# EAGLE board SparkFun_Lipo_Fuel_Gauge_Panel_v11 (EAGLE 7.4.0), part 1 of 5
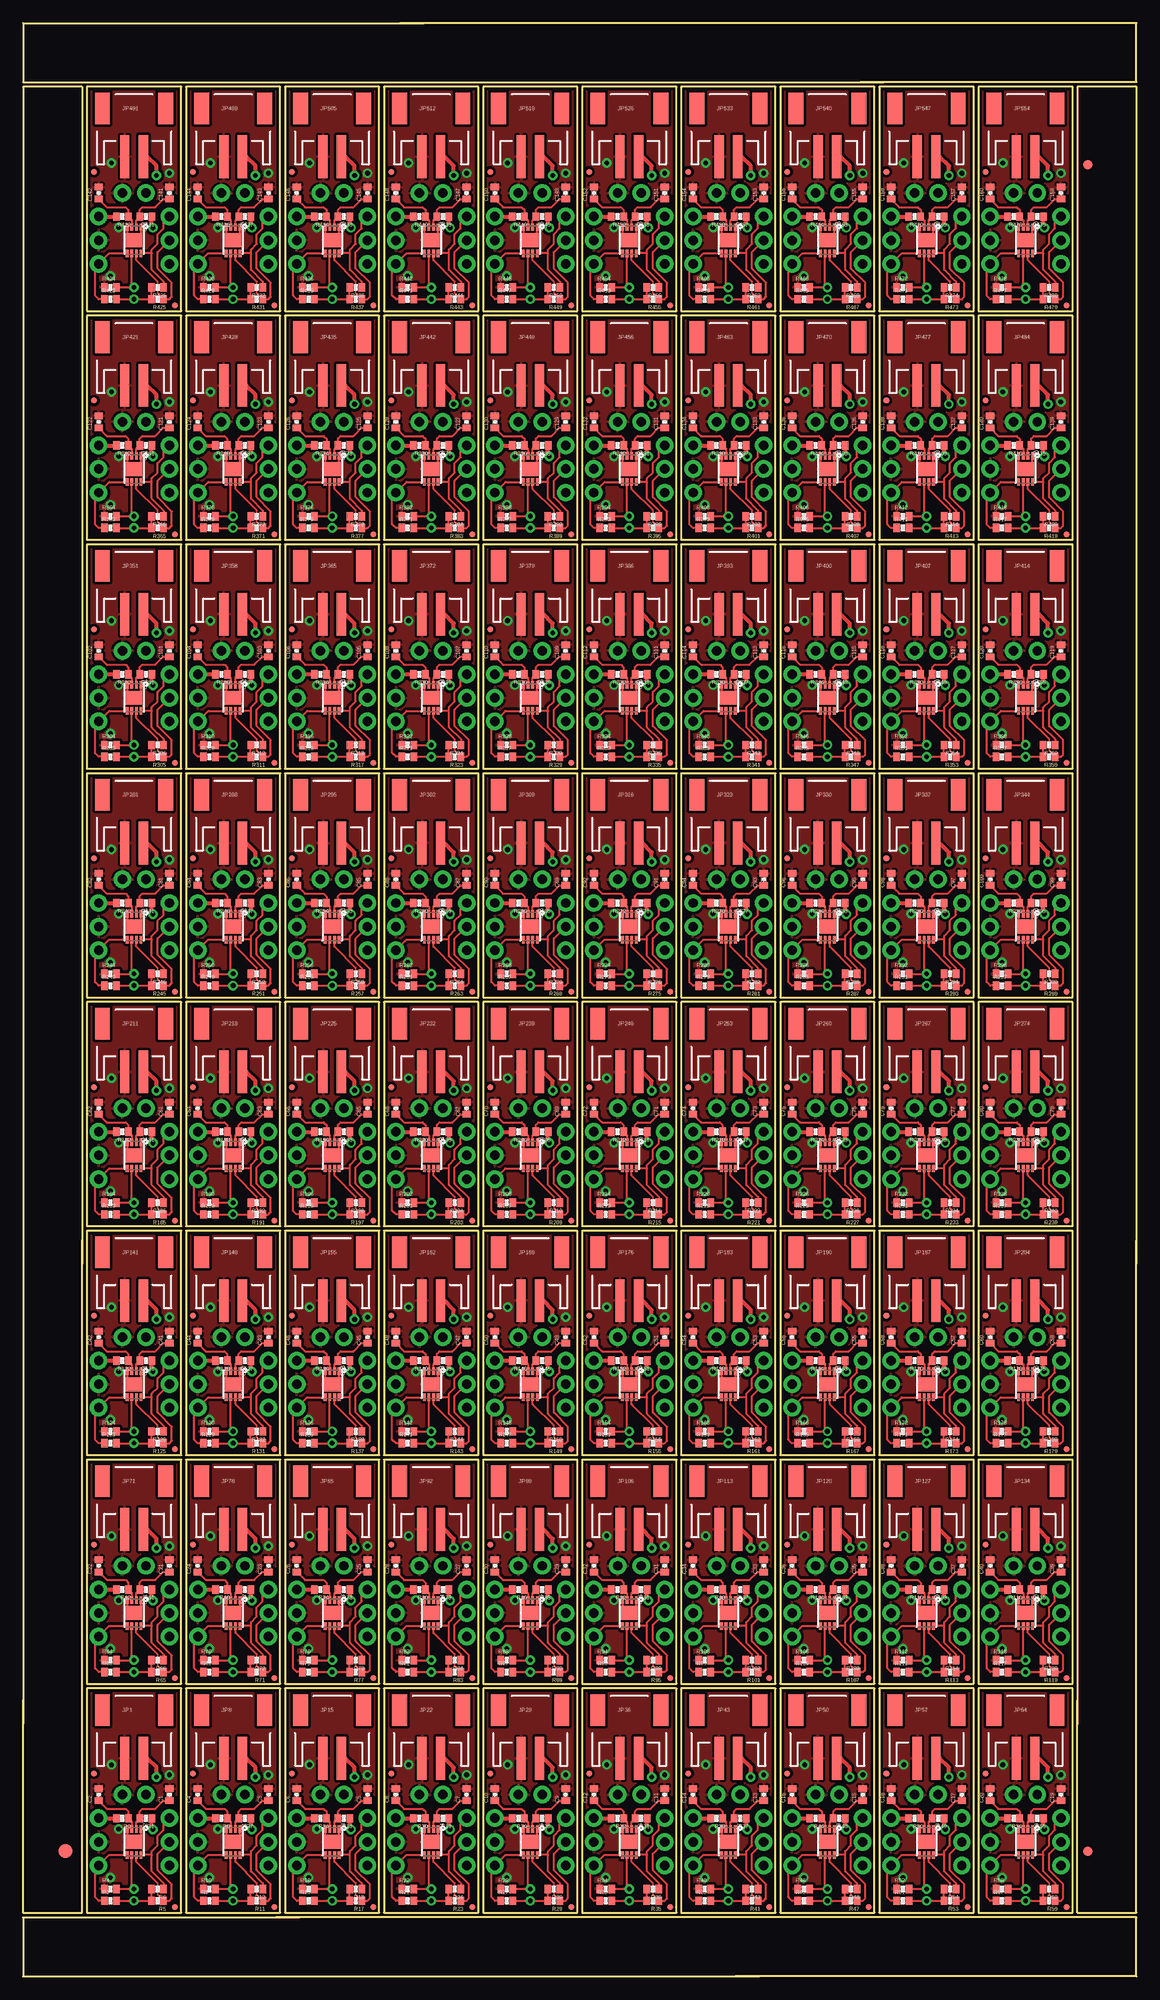
[diagram p0: board, top side]
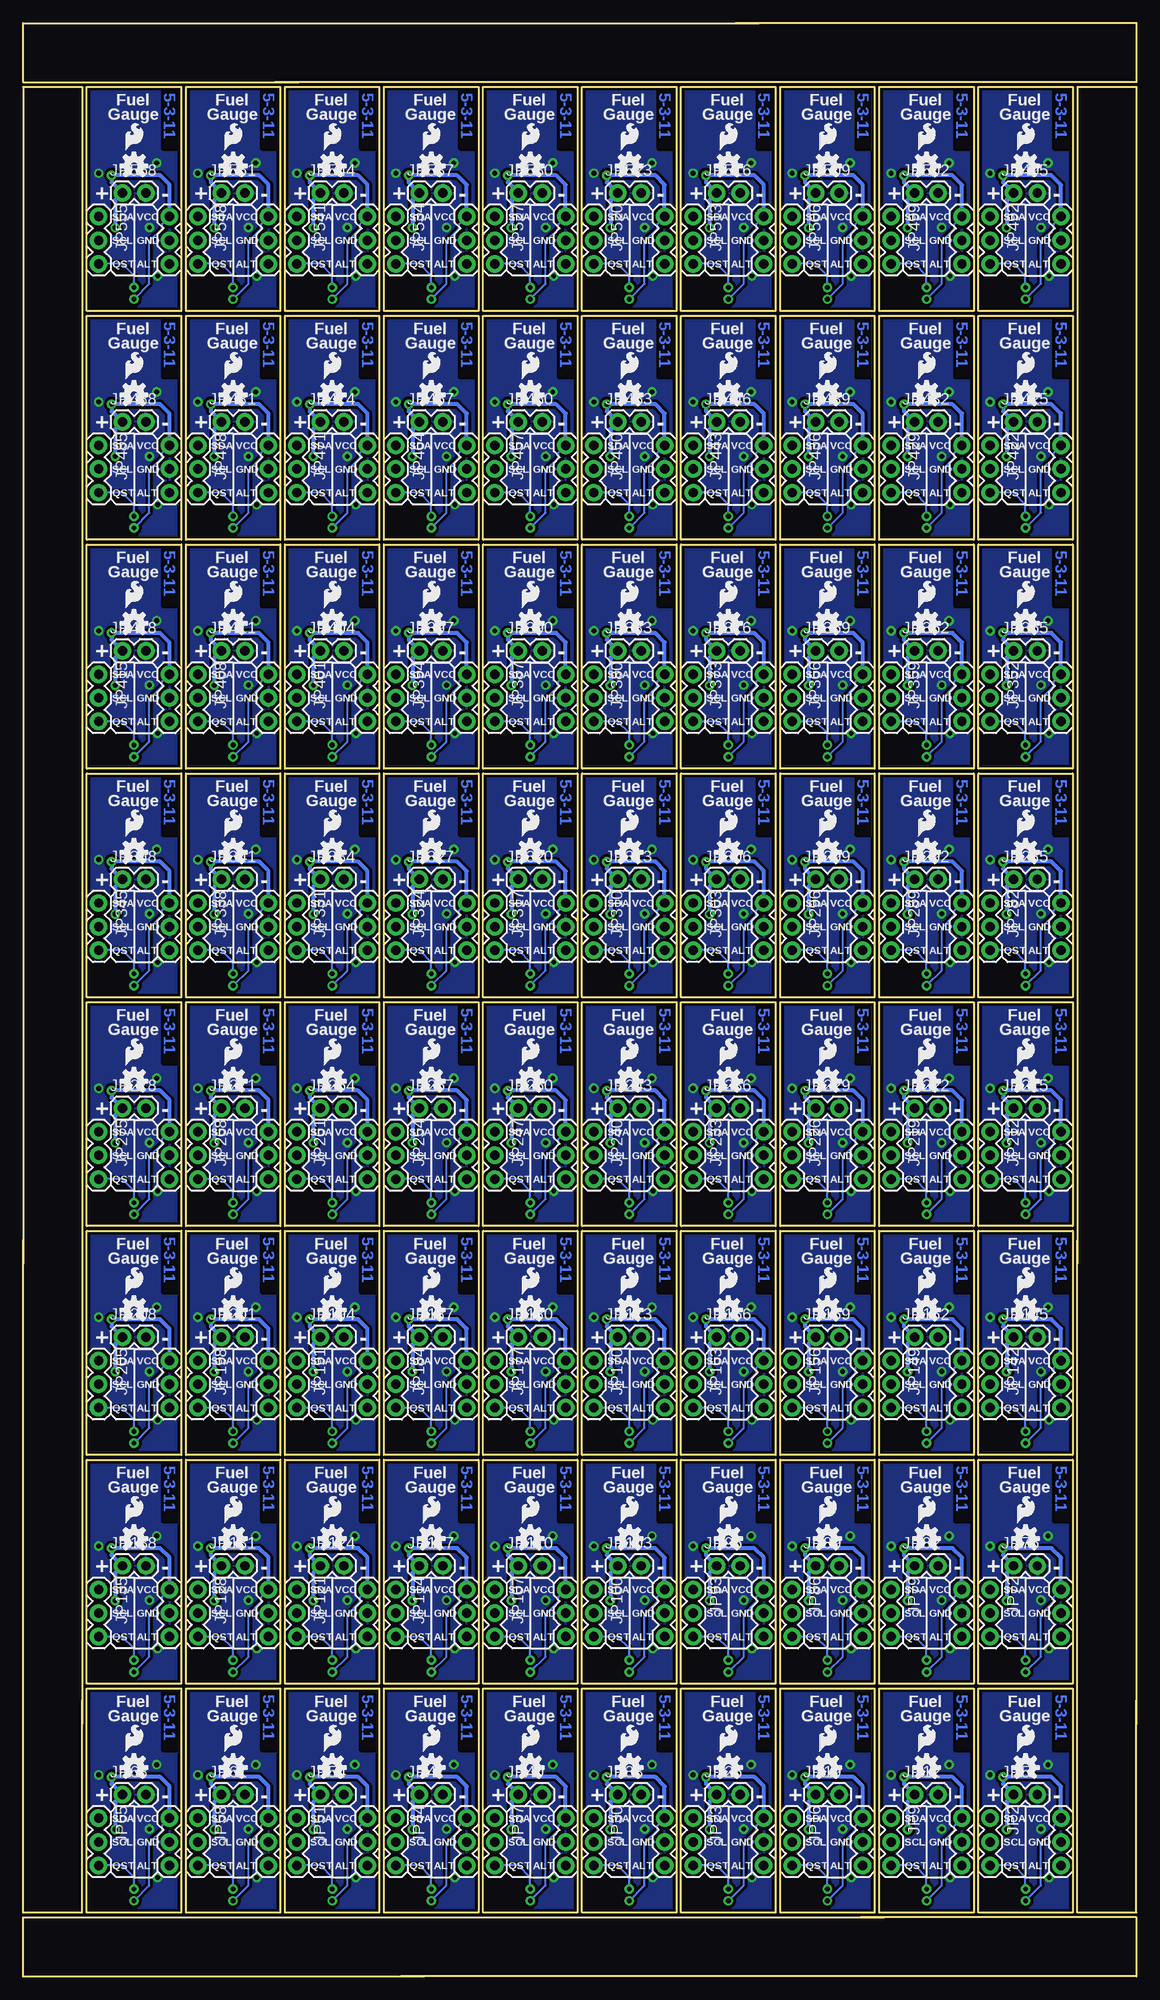
[diagram p1: board, bottom side, seen from below]

Size 119.89 x 210.31 mm. Coordinates in mm from the lower left corner, seen from the top.
Outline: 344 segments
Copper layers (1*16): Top 0.035mm / dielectric 1.5mm / Bottom 0.035mm
Design rules "SparkFun": minimum track width 8mil, minimum drill 20mil, track to track 8mil, track to pad 8mil, pad to pad 8mil, via to via 8mil, smd to smd 8mil, copper to edge 8mil, drill to drill 8mil, minimum pad ring 12mil, minimum via ring 10mil, stop-mask expansion 4mil, vias tented up to drill 20mil, thermal gap 10mil

## Footprints (pad centres in the part's own frame; a part is rotated, then mirrored left to right if it is on the bottom)
0402-CAP = smd 0.7 x 0.9: 1 -0.65,0; 2 0.65,0
FIDUCIAL-1.5X3 = smd 1.5 x 1.5: 1 0,0
FIDUCIAL-1X2 = smd 1 x 1: 1 0,0
JST-2-SMD = smd 1 x 4.6: 1 -1,-3.7; 2 1,-3.7 | smd 1.6 x 3.4: NC1 -3.4,1.5; NC2 3.4,1.5
1X03 = drill 1.016 pad 1.88: 1 0,0; 2 2.54,0; 3 5.08,0
1X02 = drill 1.016 pad 1.88: 1 0,0; 2 2.54,0
FIDUCIAL-1X2.5 = smd 0.635 x 0.635: 1 0,0
0402-RES = smd 0.7 x 0.9: 1 -0.65,0; 2 0.65,0
TDFN-8 = smd 0.8 x 0.3: 1 -1.4,0.75; 2 -1.4,0.25; 3 -1.4,-0.25; 4 -1.4,-0.75; 5 1.4,-0.75; 6 1.4,-0.25; 7 1.4,0.25; 8 1.4,0.75 | smd 1.5 x 1.88: EP 0,0

## Placement (x,y rotation side)
C1  1uF  [0402-CAP]  15.75,19.56 90 top
C2  10nF  [0402-CAP]  8.13,19.56 90 top
C3  1uF  [0402-CAP]  26.42,19.56 90 top
C4  10nF  [0402-CAP]  18.8,19.56 90 top
C5  1uF  [0402-CAP]  37.08,19.56 90 top
C6  10nF  [0402-CAP]  29.46,19.56 90 top
C7  1uF  [0402-CAP]  47.75,19.56 90 top
C8  10nF  [0402-CAP]  40.13,19.56 90 top
C9  1uF  [0402-CAP]  58.42,19.56 90 top
C10  10nF  [0402-CAP]  50.8,19.56 90 top
C11  1uF  [0402-CAP]  69.09,19.56 90 top
C12  10nF  [0402-CAP]  61.47,19.56 90 top
C13  1uF  [0402-CAP]  79.76,19.56 90 top
C14  10nF  [0402-CAP]  72.14,19.56 90 top
C15  1uF  [0402-CAP]  90.42,19.56 90 top
C16  10nF  [0402-CAP]  82.8,19.56 90 top
C17  1uF  [0402-CAP]  101.09,19.56 90 top
C18  10nF  [0402-CAP]  93.47,19.56 90 top
C19  1uF  [0402-CAP]  111.76,19.56 90 top
C20  10nF  [0402-CAP]  104.14,19.56 90 top
C21  1uF  [0402-CAP]  15.75,44.2 90 top
C22  10nF  [0402-CAP]  8.13,44.2 90 top
C23  1uF  [0402-CAP]  26.42,44.2 90 top
C24  10nF  [0402-CAP]  18.8,44.2 90 top
C25  1uF  [0402-CAP]  37.08,44.2 90 top
C26  10nF  [0402-CAP]  29.46,44.2 90 top
C27  1uF  [0402-CAP]  47.75,44.2 90 top
C28  10nF  [0402-CAP]  40.13,44.2 90 top
C29  1uF  [0402-CAP]  58.42,44.2 90 top
C30  10nF  [0402-CAP]  50.8,44.2 90 top
C31  1uF  [0402-CAP]  69.09,44.2 90 top
C32  10nF  [0402-CAP]  61.47,44.2 90 top
C33  1uF  [0402-CAP]  79.76,44.2 90 top
C34  10nF  [0402-CAP]  72.14,44.2 90 top
C35  1uF  [0402-CAP]  90.42,44.2 90 top
C36  10nF  [0402-CAP]  82.8,44.2 90 top
C37  1uF  [0402-CAP]  101.09,44.2 90 top
C38  10nF  [0402-CAP]  93.47,44.2 90 top
C39  1uF  [0402-CAP]  111.76,44.2 90 top
C40  10nF  [0402-CAP]  104.14,44.2 90 top
C41  1uF  [0402-CAP]  15.75,68.83 90 top
C42  10nF  [0402-CAP]  8.13,68.83 90 top
C43  1uF  [0402-CAP]  26.42,68.83 90 top
C44  10nF  [0402-CAP]  18.8,68.83 90 top
C45  1uF  [0402-CAP]  37.08,68.83 90 top
C46  10nF  [0402-CAP]  29.46,68.83 90 top
C47  1uF  [0402-CAP]  47.75,68.83 90 top
C48  10nF  [0402-CAP]  40.13,68.83 90 top
C49  1uF  [0402-CAP]  58.42,68.83 90 top
C50  10nF  [0402-CAP]  50.8,68.83 90 top
C51  1uF  [0402-CAP]  69.09,68.83 90 top
C52  10nF  [0402-CAP]  61.47,68.83 90 top
C53  1uF  [0402-CAP]  79.76,68.83 90 top
C54  10nF  [0402-CAP]  72.14,68.83 90 top
C55  1uF  [0402-CAP]  90.42,68.83 90 top
C56  10nF  [0402-CAP]  82.8,68.83 90 top
C57  1uF  [0402-CAP]  101.09,68.83 90 top
C58  10nF  [0402-CAP]  93.47,68.83 90 top
C59  1uF  [0402-CAP]  111.76,68.83 90 top
C60  10nF  [0402-CAP]  104.14,68.83 90 top
C61  1uF  [0402-CAP]  15.75,93.47 90 top
C62  10nF  [0402-CAP]  8.13,93.47 90 top
C63  1uF  [0402-CAP]  26.42,93.47 90 top
C64  10nF  [0402-CAP]  18.8,93.47 90 top
C65  1uF  [0402-CAP]  37.08,93.47 90 top
C66  10nF  [0402-CAP]  29.46,93.47 90 top
C67  1uF  [0402-CAP]  47.75,93.47 90 top
C68  10nF  [0402-CAP]  40.13,93.47 90 top
C69  1uF  [0402-CAP]  58.42,93.47 90 top
C70  10nF  [0402-CAP]  50.8,93.47 90 top
C71  1uF  [0402-CAP]  69.09,93.47 90 top
C72  10nF  [0402-CAP]  61.47,93.47 90 top
C73  1uF  [0402-CAP]  79.76,93.47 90 top
C74  10nF  [0402-CAP]  72.14,93.47 90 top
C75  1uF  [0402-CAP]  90.42,93.47 90 top
C76  10nF  [0402-CAP]  82.8,93.47 90 top
C77  1uF  [0402-CAP]  101.09,93.47 90 top
C78  10nF  [0402-CAP]  93.47,93.47 90 top
C79  1uF  [0402-CAP]  111.76,93.47 90 top
C80  10nF  [0402-CAP]  104.14,93.47 90 top
C81  1uF  [0402-CAP]  15.75,118.11 90 top
C82  10nF  [0402-CAP]  8.13,118.11 90 top
C83  1uF  [0402-CAP]  26.42,118.11 90 top
C84  10nF  [0402-CAP]  18.8,118.11 90 top
C85  1uF  [0402-CAP]  37.08,118.11 90 top
C86  10nF  [0402-CAP]  29.46,118.11 90 top
C87  1uF  [0402-CAP]  47.75,118.11 90 top
C88  10nF  [0402-CAP]  40.13,118.11 90 top
C89  1uF  [0402-CAP]  58.42,118.11 90 top
C90  10nF  [0402-CAP]  50.8,118.11 90 top
C91  1uF  [0402-CAP]  69.09,118.11 90 top
C92  10nF  [0402-CAP]  61.47,118.11 90 top
C93  1uF  [0402-CAP]  79.76,118.11 90 top
C94  10nF  [0402-CAP]  72.14,118.11 90 top
C95  1uF  [0402-CAP]  90.42,118.11 90 top
C96  10nF  [0402-CAP]  82.8,118.11 90 top
C97  1uF  [0402-CAP]  101.09,118.11 90 top
C98  10nF  [0402-CAP]  93.47,118.11 90 top
C99  1uF  [0402-CAP]  111.76,118.11 90 top
C100  10nF  [0402-CAP]  104.14,118.11 90 top
C101  1uF  [0402-CAP]  15.75,142.75 90 top
C102  10nF  [0402-CAP]  8.13,142.75 90 top
C103  1uF  [0402-CAP]  26.42,142.75 90 top
C104  10nF  [0402-CAP]  18.8,142.75 90 top
C105  1uF  [0402-CAP]  37.08,142.75 90 top
C106  10nF  [0402-CAP]  29.46,142.75 90 top
C107  1uF  [0402-CAP]  47.75,142.75 90 top
C108  10nF  [0402-CAP]  40.13,142.75 90 top
C109  1uF  [0402-CAP]  58.42,142.75 90 top
C110  10nF  [0402-CAP]  50.8,142.75 90 top
C111  1uF  [0402-CAP]  69.09,142.75 90 top
C112  10nF  [0402-CAP]  61.47,142.75 90 top
C113  1uF  [0402-CAP]  79.76,142.75 90 top
C114  10nF  [0402-CAP]  72.14,142.75 90 top
C115  1uF  [0402-CAP]  90.42,142.75 90 top
C116  10nF  [0402-CAP]  82.8,142.75 90 top
C117  1uF  [0402-CAP]  101.09,142.75 90 top
C118  10nF  [0402-CAP]  93.47,142.75 90 top
C119  1uF  [0402-CAP]  111.76,142.75 90 top
C120  10nF  [0402-CAP]  104.14,142.75 90 top
C121  1uF  [0402-CAP]  15.75,167.39 90 top
C122  10nF  [0402-CAP]  8.13,167.39 90 top
C123  1uF  [0402-CAP]  26.42,167.39 90 top
C124  10nF  [0402-CAP]  18.8,167.39 90 top
C125  1uF  [0402-CAP]  37.08,167.39 90 top
C126  10nF  [0402-CAP]  29.46,167.39 90 top
C127  1uF  [0402-CAP]  47.75,167.39 90 top
C128  10nF  [0402-CAP]  40.13,167.39 90 top
C129  1uF  [0402-CAP]  58.42,167.39 90 top
C130  10nF  [0402-CAP]  50.8,167.39 90 top
C131  1uF  [0402-CAP]  69.09,167.39 90 top
C132  10nF  [0402-CAP]  61.47,167.39 90 top
C133  1uF  [0402-CAP]  79.76,167.39 90 top
C134  10nF  [0402-CAP]  72.14,167.39 90 top
C135  1uF  [0402-CAP]  90.42,167.39 90 top
C136  10nF  [0402-CAP]  82.8,167.39 90 top
C137  1uF  [0402-CAP]  101.09,167.39 90 top
C138  10nF  [0402-CAP]  93.47,167.39 90 top
C139  1uF  [0402-CAP]  111.76,167.39 90 top
C140  10nF  [0402-CAP]  104.14,167.39 90 top
C141  1uF  [0402-CAP]  15.75,192.02 90 top
C142  10nF  [0402-CAP]  8.13,192.02 90 top
C143  1uF  [0402-CAP]  26.42,192.02 90 top
C144  10nF  [0402-CAP]  18.8,192.02 90 top
C145  1uF  [0402-CAP]  37.08,192.02 90 top
C146  10nF  [0402-CAP]  29.46,192.02 90 top
C147  1uF  [0402-CAP]  47.75,192.02 90 top
C148  10nF  [0402-CAP]  40.13,192.02 90 top
C149  1uF  [0402-CAP]  58.42,192.02 90 top
C150  10nF  [0402-CAP]  50.8,192.02 90 top
C151  1uF  [0402-CAP]  69.09,192.02 90 top
C152  10nF  [0402-CAP]  61.47,192.02 90 top
C153  1uF  [0402-CAP]  79.76,192.02 90 top
C154  10nF  [0402-CAP]  72.14,192.02 90 top
C155  1uF  [0402-CAP]  90.42,192.02 90 top
C156  10nF  [0402-CAP]  82.8,192.02 90 top
C157  1uF  [0402-CAP]  101.09,192.02 90 top
C158  10nF  [0402-CAP]  93.47,192.02 90 top
C159  1uF  [0402-CAP]  111.76,192.02 90 top
C160  10nF  [0402-CAP]  104.14,192.02 90 top
E$1  [FIDUCIAL-1.5X3]  4.57,13.46 0 top
E$2  [FIDUCIAL-1X2]  114.68,195.07 0 top
E$5  [FIDUCIAL-1X2]  114.68,13.46 0 top
JP1  input  [JST-2-SMD]  11.94,27.18 0 top
JP2  [1X03]  15.75,17.02 270 bottom
JP3  LOGO-SFESK  [SFE-LOGO-FLAME]  12.83,24.21 0 bottom
JP4  [1X03]  8.13,17.02 270 bottom
JP5  [1X02]  13.21,19.56 0 bottom
JP6  FIDUCIAL1X2.5  [FIDUCIAL-1X2.5]  16.36,7.47 0 top
JP7  FIDUCIAL1X2.5  [FIDUCIAL-1X2.5]  7.62,21.84 0 top
JP8  input  [JST-2-SMD]  22.61,27.18 0 top
JP9  [1X03]  26.42,17.02 270 bottom
JP10  [1X03]  18.8,17.02 270 bottom
JP11  LOGO-SFESK  [SFE-LOGO-FLAME]  23.5,24.21 0 bottom
JP12  [1X02]  23.88,19.56 0 bottom
JP13  FIDUCIAL1X2.5  [FIDUCIAL-1X2.5]  27.03,7.47 0 top
JP14  FIDUCIAL1X2.5  [FIDUCIAL-1X2.5]  18.29,21.84 0 top
JP15  input  [JST-2-SMD]  33.27,27.18 0 top
JP16  [1X03]  37.08,17.02 270 bottom
JP17  [1X03]  29.46,17.02 270 bottom
JP18  LOGO-SFESK  [SFE-LOGO-FLAME]  34.16,24.21 0 bottom
JP19  [1X02]  34.54,19.56 0 bottom
JP20  FIDUCIAL1X2.5  [FIDUCIAL-1X2.5]  37.69,7.47 0 top
JP21  FIDUCIAL1X2.5  [FIDUCIAL-1X2.5]  28.96,21.84 0 top
JP22  input  [JST-2-SMD]  43.94,27.18 0 top
JP23  [1X03]  47.75,17.02 270 bottom
JP24  [1X03]  40.13,17.02 270 bottom
JP25  LOGO-SFESK  [SFE-LOGO-FLAME]  44.83,24.21 0 bottom
JP26  [1X02]  45.21,19.56 0 bottom
JP27  FIDUCIAL1X2.5  [FIDUCIAL-1X2.5]  48.36,7.47 0 top
JP28  FIDUCIAL1X2.5  [FIDUCIAL-1X2.5]  39.62,21.84 0 top
JP29  input  [JST-2-SMD]  54.61,27.18 0 top
JP30  [1X03]  58.42,17.02 270 bottom
JP31  [1X03]  50.8,17.02 270 bottom
JP32  LOGO-SFESK  [SFE-LOGO-FLAME]  55.5,24.21 0 bottom
JP33  [1X02]  55.88,19.56 0 bottom
JP34  FIDUCIAL1X2.5  [FIDUCIAL-1X2.5]  59.03,7.47 0 top
JP35  FIDUCIAL1X2.5  [FIDUCIAL-1X2.5]  50.29,21.84 0 top
JP36  input  [JST-2-SMD]  65.28,27.18 0 top
JP37  [1X03]  69.09,17.02 270 bottom
JP38  [1X03]  61.47,17.02 270 bottom
JP39  LOGO-SFESK  [SFE-LOGO-FLAME]  66.17,24.21 0 bottom
JP40  [1X02]  66.55,19.56 0 bottom
JP41  FIDUCIAL1X2.5  [FIDUCIAL-1X2.5]  69.7,7.47 0 top
JP42  FIDUCIAL1X2.5  [FIDUCIAL-1X2.5]  60.96,21.84 0 top
JP43  input  [JST-2-SMD]  75.95,27.18 0 top
JP44  [1X03]  79.76,17.02 270 bottom
JP45  [1X03]  72.14,17.02 270 bottom
JP46  LOGO-SFESK  [SFE-LOGO-FLAME]  76.83,24.21 0 bottom
JP47  [1X02]  77.22,19.56 0 bottom
JP48  FIDUCIAL1X2.5  [FIDUCIAL-1X2.5]  80.37,7.47 0 top
JP49  FIDUCIAL1X2.5  [FIDUCIAL-1X2.5]  71.63,21.84 0 top
JP50  input  [JST-2-SMD]  86.61,27.18 0 top
JP51  [1X03]  90.42,17.02 270 bottom
JP52  [1X03]  82.8,17.02 270 bottom
JP53  LOGO-SFESK  [SFE-LOGO-FLAME]  87.5,24.21 0 bottom
JP54  [1X02]  87.88,19.56 0 bottom
JP55  FIDUCIAL1X2.5  [FIDUCIAL-1X2.5]  91.03,7.47 0 top
JP56  FIDUCIAL1X2.5  [FIDUCIAL-1X2.5]  82.3,21.84 0 top
JP57  input  [JST-2-SMD]  97.28,27.18 0 top
JP58  [1X03]  101.09,17.02 270 bottom
JP59  [1X03]  93.47,17.02 270 bottom
JP60  LOGO-SFESK  [SFE-LOGO-FLAME]  98.17,24.21 0 bottom
JP61  [1X02]  98.55,19.56 0 bottom
JP62  FIDUCIAL1X2.5  [FIDUCIAL-1X2.5]  101.7,7.47 0 top
JP63  FIDUCIAL1X2.5  [FIDUCIAL-1X2.5]  92.96,21.84 0 top
JP64  input  [JST-2-SMD]  107.95,27.18 0 top
JP65  [1X03]  111.76,17.02 270 bottom
JP66  [1X03]  104.14,17.02 270 bottom
JP67  LOGO-SFESK  [SFE-LOGO-FLAME]  108.84,24.21 0 bottom
JP68  [1X02]  109.22,19.56 0 bottom
JP69  FIDUCIAL1X2.5  [FIDUCIAL-1X2.5]  112.37,7.47 0 top
JP70  FIDUCIAL1X2.5  [FIDUCIAL-1X2.5]  103.63,21.84 0 top
JP71  input  [JST-2-SMD]  11.94,51.82 0 top
JP72  [1X03]  15.75,41.66 270 bottom
JP73  [1X03]  8.13,41.66 270 bottom
JP74  LOGO-SFESK  [SFE-LOGO-FLAME]  12.83,48.84 0 bottom
JP75  [1X02]  13.21,44.2 0 bottom
JP76  FIDUCIAL1X2.5  [FIDUCIAL-1X2.5]  16.36,32.11 0 top
JP77  FIDUCIAL1X2.5  [FIDUCIAL-1X2.5]  7.62,46.48 0 top
JP78  input  [JST-2-SMD]  22.61,51.82 0 top
JP79  [1X03]  26.42,41.66 270 bottom
JP80  [1X03]  18.8,41.66 270 bottom
JP81  LOGO-SFESK  [SFE-LOGO-FLAME]  23.5,48.84 0 bottom
JP82  [1X02]  23.88,44.2 0 bottom
JP83  FIDUCIAL1X2.5  [FIDUCIAL-1X2.5]  27.03,32.11 0 top
JP84  FIDUCIAL1X2.5  [FIDUCIAL-1X2.5]  18.29,46.48 0 top
JP85  input  [JST-2-SMD]  33.27,51.82 0 top
JP86  [1X03]  37.08,41.66 270 bottom
JP87  [1X03]  29.46,41.66 270 bottom
JP88  LOGO-SFESK  [SFE-LOGO-FLAME]  34.16,48.84 0 bottom
JP89  [1X02]  34.54,44.2 0 bottom
JP90  FIDUCIAL1X2.5  [FIDUCIAL-1X2.5]  37.69,32.11 0 top
JP91  FIDUCIAL1X2.5  [FIDUCIAL-1X2.5]  28.96,46.48 0 top
JP92  input  [JST-2-SMD]  43.94,51.82 0 top
JP93  [1X03]  47.75,41.66 270 bottom
JP94  [1X03]  40.13,41.66 270 bottom
JP95  LOGO-SFESK  [SFE-LOGO-FLAME]  44.83,48.84 0 bottom
JP96  [1X02]  45.21,44.2 0 bottom
JP97  FIDUCIAL1X2.5  [FIDUCIAL-1X2.5]  48.36,32.11 0 top
JP98  FIDUCIAL1X2.5  [FIDUCIAL-1X2.5]  39.62,46.48 0 top
JP99  input  [JST-2-SMD]  54.61,51.82 0 top
JP100  [1X03]  58.42,41.66 270 bottom
JP101  [1X03]  50.8,41.66 270 bottom
JP102  LOGO-SFESK  [SFE-LOGO-FLAME]  55.5,48.84 0 bottom
JP103  [1X02]  55.88,44.2 0 bottom
JP104  FIDUCIAL1X2.5  [FIDUCIAL-1X2.5]  59.03,32.11 0 top
JP105  FIDUCIAL1X2.5  [FIDUCIAL-1X2.5]  50.29,46.48 0 top
JP106  input  [JST-2-SMD]  65.28,51.82 0 top
JP107  [1X03]  69.09,41.66 270 bottom
JP108  [1X03]  61.47,41.66 270 bottom
JP109  LOGO-SFESK  [SFE-LOGO-FLAME]  66.17,48.84 0 bottom
JP110  [1X02]  66.55,44.2 0 bottom
JP111  FIDUCIAL1X2.5  [FIDUCIAL-1X2.5]  69.7,32.11 0 top
JP112  FIDUCIAL1X2.5  [FIDUCIAL-1X2.5]  60.96,46.48 0 top
JP113  input  [JST-2-SMD]  75.95,51.82 0 top
JP114  [1X03]  79.76,41.66 270 bottom
JP115  [1X03]  72.14,41.66 270 bottom
JP116  LOGO-SFESK  [SFE-LOGO-FLAME]  76.83,48.84 0 bottom
JP117  [1X02]  77.22,44.2 0 bottom
JP118  FIDUCIAL1X2.5  [FIDUCIAL-1X2.5]  80.37,32.11 0 top
JP119  FIDUCIAL1X2.5  [FIDUCIAL-1X2.5]  71.63,46.48 0 top
JP120  input  [JST-2-SMD]  86.61,51.82 0 top
JP121  [1X03]  90.42,41.66 270 bottom
JP122  [1X03]  82.8,41.66 270 bottom
JP123  LOGO-SFESK  [SFE-LOGO-FLAME]  87.5,48.84 0 bottom
JP124  [1X02]  87.88,44.2 0 bottom
JP125  FIDUCIAL1X2.5  [FIDUCIAL-1X2.5]  91.03,32.11 0 top
JP126  FIDUCIAL1X2.5  [FIDUCIAL-1X2.5]  82.3,46.48 0 top
JP127  input  [JST-2-SMD]  97.28,51.82 0 top
JP128  [1X03]  101.09,41.66 270 bottom
JP129  [1X03]  93.47,41.66 270 bottom
JP130  LOGO-SFESK  [SFE-LOGO-FLAME]  98.17,48.84 0 bottom
JP131  [1X02]  98.55,44.2 0 bottom
JP132  FIDUCIAL1X2.5  [FIDUCIAL-1X2.5]  101.7,32.11 0 top
JP133  FIDUCIAL1X2.5  [FIDUCIAL-1X2.5]  92.96,46.48 0 top
JP134  input  [JST-2-SMD]  107.95,51.82 0 top
JP135  [1X03]  111.76,41.66 270 bottom
JP136  [1X03]  104.14,41.66 270 bottom
JP137  LOGO-SFESK  [SFE-LOGO-FLAME]  108.84,48.84 0 bottom
JP138  [1X02]  109.22,44.2 0 bottom
JP139  FIDUCIAL1X2.5  [FIDUCIAL-1X2.5]  112.37,32.11 0 top
JP140  FIDUCIAL1X2.5  [FIDUCIAL-1X2.5]  103.63,46.48 0 top
JP141  input  [JST-2-SMD]  11.94,76.45 0 top
JP142  [1X03]  15.75,66.29 270 bottom
JP143  [1X03]  8.13,66.29 270 bottom
JP144  LOGO-SFESK  [SFE-LOGO-FLAME]  12.83,73.48 0 bottom
JP145  [1X02]  13.21,68.83 0 bottom
JP146  FIDUCIAL1X2.5  [FIDUCIAL-1X2.5]  16.36,56.74 0 top
JP147  FIDUCIAL1X2.5  [FIDUCIAL-1X2.5]  7.62,71.12 0 top
JP148  input  [JST-2-SMD]  22.61,76.45 0 top
JP149  [1X03]  26.42,66.29 270 bottom
JP150  [1X03]  18.8,66.29 270 bottom
JP151  LOGO-SFESK  [SFE-LOGO-FLAME]  23.5,73.48 0 bottom
JP152  [1X02]  23.88,68.83 0 bottom
JP153  FIDUCIAL1X2.5  [FIDUCIAL-1X2.5]  27.03,56.74 0 top
JP154  FIDUCIAL1X2.5  [FIDUCIAL-1X2.5]  18.29,71.12 0 top
JP155  input  [JST-2-SMD]  33.27,76.45 0 top
JP156  [1X03]  37.08,66.29 270 bottom
JP157  [1X03]  29.46,66.29 270 bottom
JP158  LOGO-SFESK  [SFE-LOGO-FLAME]  34.16,73.48 0 bottom
JP159  [1X02]  34.54,68.83 0 bottom
JP160  FIDUCIAL1X2.5  [FIDUCIAL-1X2.5]  37.69,56.74 0 top
JP161  FIDUCIAL1X2.5  [FIDUCIAL-1X2.5]  28.96,71.12 0 top
JP162  input  [JST-2-SMD]  43.94,76.45 0 top
JP163  [1X03]  47.75,66.29 270 bottom
JP164  [1X03]  40.13,66.29 270 bottom
JP165  LOGO-SFESK  [SFE-LOGO-FLAME]  44.83,73.48 0 bottom
JP166  [1X02]  45.21,68.83 0 bottom
JP167  FIDUCIAL1X2.5  [FIDUCIAL-1X2.5]  48.36,56.74 0 top
JP168  FIDUCIAL1X2.5  [FIDUCIAL-1X2.5]  39.62,71.12 0 top
JP169  input  [JST-2-SMD]  54.61,76.45 0 top
JP170  [1X03]  58.42,66.29 270 bottom
JP171  [1X03]  50.8,66.29 270 bottom
JP172  LOGO-SFESK  [SFE-LOGO-FLAME]  55.5,73.48 0 bottom
JP173  [1X02]  55.88,68.83 0 bottom
JP174  FIDUCIAL1X2.5  [FIDUCIAL-1X2.5]  59.03,56.74 0 top
JP175  FIDUCIAL1X2.5  [FIDUCIAL-1X2.5]  50.29,71.12 0 top
JP176  input  [JST-2-SMD]  65.28,76.45 0 top
JP177  [1X03]  69.09,66.29 270 bottom
JP178  [1X03]  61.47,66.29 270 bottom
JP179  LOGO-SFESK  [SFE-LOGO-FLAME]  66.17,73.48 0 bottom
JP180  [1X02]  66.55,68.83 0 bottom
JP181  FIDUCIAL1X2.5  [FIDUCIAL-1X2.5]  69.7,56.74 0 top
JP182  FIDUCIAL1X2.5  [FIDUCIAL-1X2.5]  60.96,71.12 0 top
JP183  input  [JST-2-SMD]  75.95,76.45 0 top
JP184  [1X03]  79.76,66.29 270 bottom
JP185  [1X03]  72.14,66.29 270 bottom
JP186  LOGO-SFESK  [SFE-LOGO-FLAME]  76.83,73.48 0 bottom
JP187  [1X02]  77.22,68.83 0 bottom
JP188  FIDUCIAL1X2.5  [FIDUCIAL-1X2.5]  80.37,56.74 0 top
JP189  FIDUCIAL1X2.5  [FIDUCIAL-1X2.5]  71.63,71.12 0 top
JP190  input  [JST-2-SMD]  86.61,76.45 0 top
JP191  [1X03]  90.42,66.29 270 bottom
JP192  [1X03]  82.8,66.29 270 bottom
JP193  LOGO-SFESK  [SFE-LOGO-FLAME]  87.5,73.48 0 bottom
JP194  [1X02]  87.88,68.83 0 bottom
JP195  FIDUCIAL1X2.5  [FIDUCIAL-1X2.5]  91.03,56.74 0 top
JP196  FIDUCIAL1X2.5  [FIDUCIAL-1X2.5]  82.3,71.12 0 top
JP197  input  [JST-2-SMD]  97.28,76.45 0 top
JP198  [1X03]  101.09,66.29 270 bottom
JP199  [1X03]  93.47,66.29 270 bottom
JP200  LOGO-SFESK  [SFE-LOGO-FLAME]  98.17,73.48 0 bottom
JP201  [1X02]  98.55,68.83 0 bottom
JP202  FIDUCIAL1X2.5  [FIDUCIAL-1X2.5]  101.7,56.74 0 top
JP203  FIDUCIAL1X2.5  [FIDUCIAL-1X2.5]  92.96,71.12 0 top
JP204  input  [JST-2-SMD]  107.95,76.45 0 top
JP205  [1X03]  111.76,66.29 270 bottom
JP206  [1X03]  104.14,66.29 270 bottom
JP207  LOGO-SFESK  [SFE-LOGO-FLAME]  108.84,73.48 0 bottom
JP208  [1X02]  109.22,68.83 0 bottom
JP209  FIDUCIAL1X2.5  [FIDUCIAL-1X2.5]  112.37,56.74 0 top
JP210  FIDUCIAL1X2.5  [FIDUCIAL-1X2.5]  103.63,71.12 0 top
JP211  input  [JST-2-SMD]  11.94,101.09 0 top
JP212  [1X03]  15.75,90.93 270 bottom
JP213  [1X03]  8.13,90.93 270 bottom
JP214  LOGO-SFESK  [SFE-LOGO-FLAME]  12.83,98.12 0 bottom
JP215  [1X02]  13.21,93.47 0 bottom
JP216  FIDUCIAL1X2.5  [FIDUCIAL-1X2.5]  16.36,81.38 0 top
JP217  FIDUCIAL1X2.5  [FIDUCIAL-1X2.5]  7.62,95.76 0 top
JP218  input  [JST-2-SMD]  22.61,101.09 0 top
JP219  [1X03]  26.42,90.93 270 bottom
JP220  [1X03]  18.8,90.93 270 bottom
JP221  LOGO-SFESK  [SFE-LOGO-FLAME]  23.5,98.12 0 bottom
JP222  [1X02]  23.88,93.47 0 bottom
JP223  FIDUCIAL1X2.5  [FIDUCIAL-1X2.5]  27.03,81.38 0 top
JP224  FIDUCIAL1X2.5  [FIDUCIAL-1X2.5]  18.29,95.76 0 top
JP225  input  [JST-2-SMD]  33.27,101.09 0 top
JP226  [1X03]  37.08,90.93 270 bottom
JP227  [1X03]  29.46,90.93 270 bottom
JP228  LOGO-SFESK  [SFE-LOGO-FLAME]  34.16,98.12 0 bottom
JP229  [1X02]  34.54,93.47 0 bottom
JP230  FIDUCIAL1X2.5  [FIDUCIAL-1X2.5]  37.69,81.38 0 top
JP231  FIDUCIAL1X2.5  [FIDUCIAL-1X2.5]  28.96,95.76 0 top
JP232  input  [JST-2-SMD]  43.94,101.09 0 top
JP233  [1X03]  47.75,90.93 270 bottom
JP234  [1X03]  40.13,90.93 270 bottom
JP235  LOGO-SFESK  [SFE-LOGO-FLAME]  44.83,98.12 0 bottom
JP236  [1X02]  45.21,93.47 0 bottom
JP237  FIDUCIAL1X2.5  [FIDUCIAL-1X2.5]  48.36,81.38 0 top
JP238  FIDUCIAL1X2.5  [FIDUCIAL-1X2.5]  39.62,95.76 0 top
JP239  input  [JST-2-SMD]  54.61,101.09 0 top
JP240  [1X03]  58.42,90.93 270 bottom
JP241  [1X03]  50.8,90.93 270 bottom
JP242  LOGO-SFESK  [SFE-LOGO-FLAME]  55.5,98.12 0 bottom
JP243  [1X02]  55.88,93.47 0 bottom
JP244  FIDUCIAL1X2.5  [FIDUCIAL-1X2.5]  59.03,81.38 0 top
JP245  FIDUCIAL1X2.5  [FIDUCIAL-1X2.5]  50.29,95.76 0 top
JP246  input  [JST-2-SMD]  65.28,101.09 0 top
JP247  [1X03]  69.09,90.93 270 bottom
JP248  [1X03]  61.47,90.93 270 bottom
JP249  LOGO-SFESK  [SFE-LOGO-FLAME]  66.17,98.12 0 bottom
JP250  [1X02]  66.55,93.47 0 bottom
JP251  FIDUCIAL1X2.5  [FIDUCIAL-1X2.5]  69.7,81.38 0 top
JP252  FIDUCIAL1X2.5  [FIDUCIAL-1X2.5]  60.96,95.76 0 top
JP253  input  [JST-2-SMD]  75.95,101.09 0 top
JP254  [1X03]  79.76,90.93 270 bottom
JP255  [1X03]  72.14,90.93 270 bottom
JP256  LOGO-SFESK  [SFE-LOGO-FLAME]  76.83,98.12 0 bottom
JP257  [1X02]  77.22,93.47 0 bottom
JP258  FIDUCIAL1X2.5  [FIDUCIAL-1X2.5]  80.37,81.38 0 top
JP259  FIDUCIAL1X2.5  [FIDUCIAL-1X2.5]  71.63,95.76 0 top
JP260  input  [JST-2-SMD]  86.61,101.09 0 top
JP261  [1X03]  90.42,90.93 270 bottom
JP262  [1X03]  82.8,90.93 270 bottom
JP263  LOGO-SFESK  [SFE-LOGO-FLAME]  87.5,98.12 0 bottom
JP264  [1X02]  87.88,93.47 0 bottom
JP265  FIDUCIAL1X2.5  [FIDUCIAL-1X2.5]  91.03,81.38 0 top
JP266  FIDUCIAL1X2.5  [FIDUCIAL-1X2.5]  82.3,95.76 0 top
JP267  input  [JST-2-SMD]  97.28,101.09 0 top
JP268  [1X03]  101.09,90.93 270 bottom
JP269  [1X03]  93.47,90.93 270 bottom
JP270  LOGO-SFESK  [SFE-LOGO-FLAME]  98.17,98.12 0 bottom
JP271  [1X02]  98.55,93.47 0 bottom
JP272  FIDUCIAL1X2.5  [FIDUCIAL-1X2.5]  101.7,81.38 0 top
JP273  FIDUCIAL1X2.5  [FIDUCIAL-1X2.5]  92.96,95.76 0 top
JP274  input  [JST-2-SMD]  107.95,101.09 0 top
JP275  [1X03]  111.76,90.93 270 bottom
JP276  [1X03]  104.14,90.93 270 bottom
JP277  LOGO-SFESK  [SFE-LOGO-FLAME]  108.84,98.12 0 bottom
JP278  [1X02]  109.22,93.47 0 bottom
JP279  FIDUCIAL1X2.5  [FIDUCIAL-1X2.5]  112.37,81.38 0 top
JP280  FIDUCIAL1X2.5  [FIDUCIAL-1X2.5]  103.63,95.76 0 top
JP281  input  [JST-2-SMD]  11.94,125.73 0 top
JP282  [1X03]  15.75,115.57 270 bottom
JP283  [1X03]  8.13,115.57 270 bottom
JP284  LOGO-SFESK  [SFE-LOGO-FLAME]  12.83,122.76 0 bottom
JP285  [1X02]  13.21,118.11 0 bottom
JP286  FIDUCIAL1X2.5  [FIDUCIAL-1X2.5]  16.36,106.02 0 top
JP287  FIDUCIAL1X2.5  [FIDUCIAL-1X2.5]  7.62,120.4 0 top
JP288  input  [JST-2-SMD]  22.61,125.73 0 top
JP289  [1X03]  26.42,115.57 270 bottom
JP290  [1X03]  18.8,115.57 270 bottom
JP291  LOGO-SFESK  [SFE-LOGO-FLAME]  23.5,122.76 0 bottom
JP292  [1X02]  23.88,118.11 0 bottom
JP293  FIDUCIAL1X2.5  [FIDUCIAL-1X2.5]  27.03,106.02 0 top
JP294  FIDUCIAL1X2.5  [FIDUCIAL-1X2.5]  18.29,120.4 0 top
JP295  input  [JST-2-SMD]  33.27,125.73 0 top
JP296  [1X03]  37.08,115.57 270 bottom
JP297  [1X03]  29.46,115.57 270 bottom
JP298  LOGO-SFESK  [SFE-LOGO-FLAME]  34.16,122.76 0 bottom
JP299  [1X02]  34.54,118.11 0 bottom
JP300  FIDUCIAL1X2.5  [FIDUCIAL-1X2.5]  37.69,106.02 0 top
JP301  FIDUCIAL1X2.5  [FIDUCIAL-1X2.5]  28.96,120.4 0 top
JP302  input  [JST-2-SMD]  43.94,125.73 0 top
JP303  [1X03]  47.75,115.57 270 bottom
JP304  [1X03]  40.13,115.57 270 bottom
JP305  LOGO-SFESK  [SFE-LOGO-FLAME]  44.83,122.76 0 bottom
JP306  [1X02]  45.21,118.11 0 bottom
JP307  FIDUCIAL1X2.5  [FIDUCIAL-1X2.5]  48.36,106.02 0 top
JP308  FIDUCIAL1X2.5  [FIDUCIAL-1X2.5]  39.62,120.4 0 top
JP309  input  [JST-2-SMD]  54.61,125.73 0 top
JP310  [1X03]  58.42,115.57 270 bottom
JP311  [1X03]  50.8,115.57 270 bottom
JP312  LOGO-SFESK  [SFE-LOGO-FLAME]  55.5,122.76 0 bottom
JP313  [1X02]  55.88,118.11 0 bottom
JP314  FIDUCIAL1X2.5  [FIDUCIAL-1X2.5]  59.03,106.02 0 top
JP315  FIDUCIAL1X2.5  [FIDUCIAL-1X2.5]  50.29,120.4 0 top
JP316  input  [JST-2-SMD]  65.28,125.73 0 top
JP317  [1X03]  69.09,115.57 270 bottom
JP318  [1X03]  61.47,115.57 270 bottom
JP319  LOGO-SFESK  [SFE-LOGO-FLAME]  66.17,122.76 0 bottom
JP320  [1X02]  66.55,118.11 0 bottom
JP321  FIDUCIAL1X2.5  [FIDUCIAL-1X2.5]  69.7,106.02 0 top
JP322  FIDUCIAL1X2.5  [FIDUCIAL-1X2.5]  60.96,120.4 0 top
JP323  input  [JST-2-SMD]  75.95,125.73 0 top
JP324  [1X03]  79.76,115.57 270 bottom
JP325  [1X03]  72.14,115.57 270 bottom
JP326  LOGO-SFESK  [SFE-LOGO-FLAME]  76.83,122.76 0 bottom
JP327  [1X02]  77.22,118.11 0 bottom
JP328  FIDUCIAL1X2.5  [FIDUCIAL-1X2.5]  80.37,106.02 0 top
JP329  FIDUCIAL1X2.5  [FIDUCIAL-1X2.5]  71.63,120.4 0 top
JP330  input  [JST-2-SMD]  86.61,125.73 0 top
JP331  [1X03]  90.42,115.57 270 bottom
JP332  [1X03]  82.8,115.57 270 bottom
JP333  LOGO-SFESK  [SFE-LOGO-FLAME]  87.5,122.76 0 bottom
JP334  [1X02]  87.88,118.11 0 bottom
JP335  FIDUCIAL1X2.5  [FIDUCIAL-1X2.5]  91.03,106.02 0 top
JP336  FIDUCIAL1X2.5  [FIDUCIAL-1X2.5]  82.3,120.4 0 top
JP337  input  [JST-2-SMD]  97.28,125.73 0 top
JP338  [1X03]  101.09,115.57 270 bottom
JP339  [1X03]  93.47,115.57 270 bottom
JP340  LOGO-SFESK  [SFE-LOGO-FLAME]  98.17,122.76 0 bottom
JP341  [1X02]  98.55,118.11 0 bottom
JP342  FIDUCIAL1X2.5  [FIDUCIAL-1X2.5]  101.7,106.02 0 top
JP343  FIDUCIAL1X2.5  [FIDUCIAL-1X2.5]  92.96,120.4 0 top
JP344  input  [JST-2-SMD]  107.95,125.73 0 top
JP345  [1X03]  111.76,115.57 270 bottom
JP346  [1X03]  104.14,115.57 270 bottom
JP347  LOGO-SFESK  [SFE-LOGO-FLAME]  108.84,122.76 0 bottom
JP348  [1X02]  109.22,118.11 0 bottom
JP349  FIDUCIAL1X2.5  [FIDUCIAL-1X2.5]  112.37,106.02 0 top
JP350  FIDUCIAL1X2.5  [FIDUCIAL-1X2.5]  103.63,120.4 0 top
JP351  input  [JST-2-SMD]  11.94,150.37 0 top
JP352  [1X03]  15.75,140.21 270 bottom
JP353  [1X03]  8.13,140.21 270 bottom
JP354  LOGO-SFESK  [SFE-LOGO-FLAME]  12.83,147.4 0 bottom
JP355  [1X02]  13.21,142.75 0 bottom
JP356  FIDUCIAL1X2.5  [FIDUCIAL-1X2.5]  16.36,130.66 0 top
JP357  FIDUCIAL1X2.5  [FIDUCIAL-1X2.5]  7.62,145.03 0 top
JP358  input  [JST-2-SMD]  22.61,150.37 0 top
JP359  [1X03]  26.42,140.21 270 bottom
JP360  [1X03]  18.8,140.21 270 bottom
JP361  LOGO-SFESK  [SFE-LOGO-FLAME]  23.5,147.4 0 bottom
JP362  [1X02]  23.88,142.75 0 bottom
JP363  FIDUCIAL1X2.5  [FIDUCIAL-1X2.5]  27.03,130.66 0 top
JP364  FIDUCIAL1X2.5  [FIDUCIAL-1X2.5]  18.29,145.03 0 top
JP365  input  [JST-2-SMD]  33.27,150.37 0 top
JP366  [1X03]  37.08,140.21 270 bottom
JP367  [1X03]  29.46,140.21 270 bottom
JP368  LOGO-SFESK  [SFE-LOGO-FLAME]  34.16,147.4 0 bottom
JP369  [1X02]  34.54,142.75 0 bottom
JP370  FIDUCIAL1X2.5  [FIDUCIAL-1X2.5]  37.69,130.66 0 top
JP371  FIDUCIAL1X2.5  [FIDUCIAL-1X2.5]  28.96,145.03 0 top
JP372  input  [JST-2-SMD]  43.94,150.37 0 top
JP373  [1X03]  47.75,140.21 270 bottom
JP374  [1X03]  40.13,140.21 270 bottom
JP375  LOGO-SFESK  [SFE-LOGO-FLAME]  44.83,147.4 0 bottom
JP376  [1X02]  45.21,142.75 0 bottom
JP377  FIDUCIAL1X2.5  [FIDUCIAL-1X2.5]  48.36,130.66 0 top
JP378  FIDUCIAL1X2.5  [FIDUCIAL-1X2.5]  39.62,145.03 0 top
JP379  input  [JST-2-SMD]  54.61,150.37 0 top
JP380  [1X03]  58.42,140.21 270 bottom
JP381  [1X03]  50.8,140.21 270 bottom
JP382  LOGO-SFESK  [SFE-LOGO-FLAME]  55.5,147.4 0 bottom
JP383  [1X02]  55.88,142.75 0 bottom
JP384  FIDUCIAL1X2.5  [FIDUCIAL-1X2.5]  59.03,130.66 0 top
JP385  FIDUCIAL1X2.5  [FIDUCIAL-1X2.5]  50.29,145.03 0 top
JP386  input  [JST-2-SMD]  65.28,150.37 0 top
JP387  [1X03]  69.09,140.21 270 bottom
JP388  [1X03]  61.47,140.21 270 bottom
JP389  LOGO-SFESK  [SFE-LOGO-FLAME]  66.17,147.4 0 bottom
JP390  [1X02]  66.55,142.75 0 bottom
JP391  FIDUCIAL1X2.5  [FIDUCIAL-1X2.5]  69.7,130.66 0 top
JP392  FIDUCIAL1X2.5  [FIDUCIAL-1X2.5]  60.96,145.03 0 top
JP393  input  [JST-2-SMD]  75.95,150.37 0 top
JP394  [1X03]  79.76,140.21 270 bottom
JP395  [1X03]  72.14,140.21 270 bottom
JP396  LOGO-SFESK  [SFE-LOGO-FLAME]  76.83,147.4 0 bottom
JP397  [1X02]  77.22,142.75 0 bottom
JP398  FIDUCIAL1X2.5  [FIDUCIAL-1X2.5]  80.37,130.66 0 top
JP399  FIDUCIAL1X2.5  [FIDUCIAL-1X2.5]  71.63,145.03 0 top
JP400  input  [JST-2-SMD]  86.61,150.37 0 top
JP401  [1X03]  90.42,140.21 270 bottom
JP402  [1X03]  82.8,140.21 270 bottom
JP403  LOGO-SFESK  [SFE-LOGO-FLAME]  87.5,147.4 0 bottom
JP404  [1X02]  87.88,142.75 0 bottom
JP405  FIDUCIAL1X2.5  [FIDUCIAL-1X2.5]  91.03,130.66 0 top
JP406  FIDUCIAL1X2.5  [FIDUCIAL-1X2.5]  82.3,145.03 0 top
JP407  input  [JST-2-SMD]  97.28,150.37 0 top
JP408  [1X03]  101.09,140.21 270 bottom
JP409  [1X03]  93.47,140.21 270 bottom
JP410  LOGO-SFESK  [SFE-LOGO-FLAME]  98.17,147.4 0 bottom
JP411  [1X02]  98.55,142.75 0 bottom
JP412  FIDUCIAL1X2.5  [FIDUCIAL-1X2.5]  101.7,130.66 0 top
JP413  FIDUCIAL1X2.5  [FIDUCIAL-1X2.5]  92.96,145.03 0 top
JP414  input  [JST-2-SMD]  107.95,150.37 0 top
JP415  [1X03]  111.76,140.21 270 bottom
JP416  [1X03]  104.14,140.21 270 bottom
JP417  LOGO-SFESK  [SFE-LOGO-FLAME]  108.84,147.4 0 bottom
JP418  [1X02]  109.22,142.75 0 bottom
JP419  FIDUCIAL1X2.5  [FIDUCIAL-1X2.5]  112.37,130.66 0 top
JP420  FIDUCIAL1X2.5  [FIDUCIAL-1X2.5]  103.63,145.03 0 top
JP421  input  [JST-2-SMD]  11.94,175.01 0 top
JP422  [1X03]  15.75,164.85 270 bottom
JP423  [1X03]  8.13,164.85 270 bottom
JP424  LOGO-SFESK  [SFE-LOGO-FLAME]  12.83,172.03 0 bottom
JP425  [1X02]  13.21,167.39 0 bottom
JP426  FIDUCIAL1X2.5  [FIDUCIAL-1X2.5]  16.36,155.3 0 top
JP427  FIDUCIAL1X2.5  [FIDUCIAL-1X2.5]  7.62,169.67 0 top
JP428  input  [JST-2-SMD]  22.61,175.01 0 top
JP429  [1X03]  26.42,164.85 270 bottom
JP430  [1X03]  18.8,164.85 270 bottom
JP431  LOGO-SFESK  [SFE-LOGO-FLAME]  23.5,172.03 0 bottom
JP432  [1X02]  23.88,167.39 0 bottom
JP433  FIDUCIAL1X2.5  [FIDUCIAL-1X2.5]  27.03,155.3 0 top
JP434  FIDUCIAL1X2.5  [FIDUCIAL-1X2.5]  18.29,169.67 0 top
JP435  input  [JST-2-SMD]  33.27,175.01 0 top
JP436  [1X03]  37.08,164.85 270 bottom
JP437  [1X03]  29.46,164.85 270 bottom
JP438  LOGO-SFESK  [SFE-LOGO-FLAME]  34.16,172.03 0 bottom
JP439  [1X02]  34.54,167.39 0 bottom
JP440  FIDUCIAL1X2.5  [FIDUCIAL-1X2.5]  37.69,155.3 0 top
JP441  FIDUCIAL1X2.5  [FIDUCIAL-1X2.5]  28.96,169.67 0 top
JP442  input  [JST-2-SMD]  43.94,175.01 0 top
JP443  [1X03]  47.75,164.85 270 bottom
JP444  [1X03]  40.13,164.85 270 bottom
JP445  LOGO-SFESK  [SFE-LOGO-FLAME]  44.83,172.03 0 bottom
JP446  [1X02]  45.21,167.39 0 bottom
JP447  FIDUCIAL1X2.5  [FIDUCIAL-1X2.5]  48.36,155.3 0 top
JP448  FIDUCIAL1X2.5  [FIDUCIAL-1X2.5]  39.62,169.67 0 top
JP449  input  [JST-2-SMD]  54.61,175.01 0 top
JP450  [1X03]  58.42,164.85 270 bottom
JP451  [1X03]  50.8,164.85 270 bottom
JP452  LOGO-SFESK  [SFE-LOGO-FLAME]  55.5,172.03 0 bottom
JP453  [1X02]  55.88,167.39 0 bottom
JP454  FIDUCIAL1X2.5  [FIDUCIAL-1X2.5]  59.03,155.3 0 top
JP455  FIDUCIAL1X2.5  [FIDUCIAL-1X2.5]  50.29,169.67 0 top
JP456  input  [JST-2-SMD]  65.28,175.01 0 top
JP457  [1X03]  69.09,164.85 270 bottom
JP458  [1X03]  61.47,164.85 270 bottom
JP459  LOGO-SFESK  [SFE-LOGO-FLAME]  66.17,172.03 0 bottom
JP460  [1X02]  66.55,167.39 0 bottom
JP461  FIDUCIAL1X2.5  [FIDUCIAL-1X2.5]  69.7,155.3 0 top
JP462  FIDUCIAL1X2.5  [FIDUCIAL-1X2.5]  60.96,169.67 0 top
JP463  input  [JST-2-SMD]  75.95,175.01 0 top
JP464  [1X03]  79.76,164.85 270 bottom
JP465  [1X03]  72.14,164.85 270 bottom
JP466  LOGO-SFESK  [SFE-LOGO-FLAME]  76.83,172.03 0 bottom
JP467  [1X02]  77.22,167.39 0 bottom
JP468  FIDUCIAL1X2.5  [FIDUCIAL-1X2.5]  80.37,155.3 0 top
JP469  FIDUCIAL1X2.5  [FIDUCIAL-1X2.5]  71.63,169.67 0 top
JP470  input  [JST-2-SMD]  86.61,175.01 0 top
JP471  [1X03]  90.42,164.85 270 bottom
JP472  [1X03]  82.8,164.85 270 bottom
JP473  LOGO-SFESK  [SFE-LOGO-FLAME]  87.5,172.03 0 bottom
JP474  [1X02]  87.88,167.39 0 bottom
JP475  FIDUCIAL1X2.5  [FIDUCIAL-1X2.5]  91.03,155.3 0 top
JP476  FIDUCIAL1X2.5  [FIDUCIAL-1X2.5]  82.3,169.67 0 top
JP477  input  [JST-2-SMD]  97.28,175.01 0 top
JP478  [1X03]  101.09,164.85 270 bottom
JP479  [1X03]  93.47,164.85 270 bottom
JP480  LOGO-SFESK  [SFE-LOGO-FLAME]  98.17,172.03 0 bottom
JP481  [1X02]  98.55,167.39 0 bottom
JP482  FIDUCIAL1X2.5  [FIDUCIAL-1X2.5]  101.7,155.3 0 top
JP483  FIDUCIAL1X2.5  [FIDUCIAL-1X2.5]  92.96,169.67 0 top
JP484  input  [JST-2-SMD]  107.95,175.01 0 top
JP485  [1X03]  111.76,164.85 270 bottom
JP486  [1X03]  104.14,164.85 270 bottom
JP487  LOGO-SFESK  [SFE-LOGO-FLAME]  108.84,172.03 0 bottom
JP488  [1X02]  109.22,167.39 0 bottom
JP489  FIDUCIAL1X2.5  [FIDUCIAL-1X2.5]  112.37,155.3 0 top
JP490  FIDUCIAL1X2.5  [FIDUCIAL-1X2.5]  103.63,169.67 0 top
JP491  input  [JST-2-SMD]  11.94,199.64 0 top
JP492  [1X03]  15.75,189.48 270 bottom
JP493  [1X03]  8.13,189.48 270 bottom
JP494  LOGO-SFESK  [SFE-LOGO-FLAME]  12.83,196.67 0 bottom
JP495  [1X02]  13.21,192.02 0 bottom
JP496  FIDUCIAL1X2.5  [FIDUCIAL-1X2.5]  16.36,179.93 0 top
JP497  FIDUCIAL1X2.5  [FIDUCIAL-1X2.5]  7.62,194.31 0 top
JP498  input  [JST-2-SMD]  22.61,199.64 0 top
JP499  [1X03]  26.42,189.48 270 bottom
JP500  [1X03]  18.8,189.48 270 bottom
JP501  LOGO-SFESK  [SFE-LOGO-FLAME]  23.5,196.67 0 bottom
JP502  [1X02]  23.88,192.02 0 bottom
JP503  FIDUCIAL1X2.5  [FIDUCIAL-1X2.5]  27.03,179.93 0 top
JP504  FIDUCIAL1X2.5  [FIDUCIAL-1X2.5]  18.29,194.31 0 top
JP505  input  [JST-2-SMD]  33.27,199.64 0 top
JP506  [1X03]  37.08,189.48 270 bottom
JP507  [1X03]  29.46,189.48 270 bottom
JP508  LOGO-SFESK  [SFE-LOGO-FLAME]  34.16,196.67 0 bottom
JP509  [1X02]  34.54,192.02 0 bottom
JP510  FIDUCIAL1X2.5  [FIDUCIAL-1X2.5]  37.69,179.93 0 top
JP511  FIDUCIAL1X2.5  [FIDUCIAL-1X2.5]  28.96,194.31 0 top
JP512  input  [JST-2-SMD]  43.94,199.64 0 top
JP513  [1X03]  47.75,189.48 270 bottom
JP514  [1X03]  40.13,189.48 270 bottom
JP515  LOGO-SFESK  [SFE-LOGO-FLAME]  44.83,196.67 0 bottom
JP516  [1X02]  45.21,192.02 0 bottom
JP517  FIDUCIAL1X2.5  [FIDUCIAL-1X2.5]  48.36,179.93 0 top
JP518  FIDUCIAL1X2.5  [FIDUCIAL-1X2.5]  39.62,194.31 0 top
JP519  input  [JST-2-SMD]  54.61,199.64 0 top
JP520  [1X03]  58.42,189.48 270 bottom
JP521  [1X03]  50.8,189.48 270 bottom
JP522  LOGO-SFESK  [SFE-LOGO-FLAME]  55.5,196.67 0 bottom
JP523  [1X02]  55.88,192.02 0 bottom
JP524  FIDUCIAL1X2.5  [FIDUCIAL-1X2.5]  59.03,179.93 0 top
JP525  FIDUCIAL1X2.5  [FIDUCIAL-1X2.5]  50.29,194.31 0 top
JP526  input  [JST-2-SMD]  65.28,199.64 0 top
JP527  [1X03]  69.09,189.48 270 bottom
JP528  [1X03]  61.47,189.48 270 bottom
JP529  LOGO-SFESK  [SFE-LOGO-FLAME]  66.17,196.67 0 bottom
JP530  [1X02]  66.55,192.02 0 bottom
JP531  FIDUCIAL1X2.5  [FIDUCIAL-1X2.5]  69.7,179.93 0 top
JP532  FIDUCIAL1X2.5  [FIDUCIAL-1X2.5]  60.96,194.31 0 top
JP533  input  [JST-2-SMD]  75.95,199.64 0 top
JP534  [1X03]  79.76,189.48 270 bottom
JP535  [1X03]  72.14,189.48 270 bottom
JP536  LOGO-SFESK  [SFE-LOGO-FLAME]  76.83,196.67 0 bottom
JP537  [1X02]  77.22,192.02 0 bottom
JP538  FIDUCIAL1X2.5  [FIDUCIAL-1X2.5]  80.37,179.93 0 top
JP539  FIDUCIAL1X2.5  [FIDUCIAL-1X2.5]  71.63,194.31 0 top
JP540  input  [JST-2-SMD]  86.61,199.64 0 top
JP541  [1X03]  90.42,189.48 270 bottom
JP542  [1X03]  82.8,189.48 270 bottom
JP543  LOGO-SFESK  [SFE-LOGO-FLAME]  87.5,196.67 0 bottom
JP544  [1X02]  87.88,192.02 0 bottom
JP545  FIDUCIAL1X2.5  [FIDUCIAL-1X2.5]  91.03,179.93 0 top
JP546  FIDUCIAL1X2.5  [FIDUCIAL-1X2.5]  82.3,194.31 0 top
JP547  input  [JST-2-SMD]  97.28,199.64 0 top
JP548  [1X03]  101.09,189.48 270 bottom
JP549  [1X03]  93.47,189.48 270 bottom
JP550  LOGO-SFESK  [SFE-LOGO-FLAME]  98.17,196.67 0 bottom
JP551  [1X02]  98.55,192.02 0 bottom
JP552  FIDUCIAL1X2.5  [FIDUCIAL-1X2.5]  101.7,179.93 0 top
JP553  FIDUCIAL1X2.5  [FIDUCIAL-1X2.5]  92.96,194.31 0 top
JP554  input  [JST-2-SMD]  107.95,199.64 0 top
JP555  [1X03]  111.76,189.48 270 bottom
JP556  [1X03]  104.14,189.48 270 bottom
JP557  LOGO-SFESK  [SFE-LOGO-FLAME]  108.84,196.67 0 bottom
JP558  [1X02]  109.22,192.02 0 bottom
JP559  FIDUCIAL1X2.5  [FIDUCIAL-1X2.5]  112.37,179.93 0 top
JP560  FIDUCIAL1X2.5  [FIDUCIAL-1X2.5]  103.63,194.31 0 top
R1  1k  [0402-RES]  13.21,17.02 180 top
R2  180  [0402-RES]  10.67,17.02 180 top
R3  4.7k  [0402-RES]  9.4,8.13 0 top
R4  4.7k  [0402-RES]  9.4,9.4 0 top
R5  4.7k  [0402-RES]  14.48,8.13 180 top
R6  4.7k  [0402-RES]  14.48,9.4 180 top
R7  1k  [0402-RES]  23.88,17.02 180 top
R8  180  [0402-RES]  21.34,17.02 180 top
R9  4.7k  [0402-RES]  20.07,8.13 0 top
R10  4.7k  [0402-RES]  20.07,9.4 0 top
R11  4.7k  [0402-RES]  25.15,8.13 180 top
R12  4.7k  [0402-RES]  25.15,9.4 180 top
R13  1k  [0402-RES]  34.54,17.02 180 top
R14  180  [0402-RES]  32,17.02 180 top
R15  4.7k  [0402-RES]  30.73,8.13 0 top
R16  4.7k  [0402-RES]  30.73,9.4 0 top
R17  4.7k  [0402-RES]  35.81,8.13 180 top
R18  4.7k  [0402-RES]  35.81,9.4 180 top
R19  1k  [0402-RES]  45.21,17.02 180 top
R20  180  [0402-RES]  42.67,17.02 180 top
R21  4.7k  [0402-RES]  41.4,8.13 0 top
R22  4.7k  [0402-RES]  41.4,9.4 0 top
R23  4.7k  [0402-RES]  46.48,8.13 180 top
R24  4.7k  [0402-RES]  46.48,9.4 180 top
R25  1k  [0402-RES]  55.88,17.02 180 top
R26  180  [0402-RES]  53.34,17.02 180 top
R27  4.7k  [0402-RES]  52.07,8.13 0 top
R28  4.7k  [0402-RES]  52.07,9.4 0 top
R29  4.7k  [0402-RES]  57.15,8.13 180 top
R30  4.7k  [0402-RES]  57.15,9.4 180 top
R31  1k  [0402-RES]  66.55,17.02 180 top
R32  180  [0402-RES]  64.01,17.02 180 top
R33  4.7k  [0402-RES]  62.74,8.13 0 top
R34  4.7k  [0402-RES]  62.74,9.4 0 top
R35  4.7k  [0402-RES]  67.82,8.13 180 top
R36  4.7k  [0402-RES]  67.82,9.4 180 top
R37  1k  [0402-RES]  77.22,17.02 180 top
R38  180  [0402-RES]  74.68,17.02 180 top
R39  4.7k  [0402-RES]  73.41,8.13 0 top
R40  4.7k  [0402-RES]  73.41,9.4 0 top
R41  4.7k  [0402-RES]  78.49,8.13 180 top
R42  4.7k  [0402-RES]  78.49,9.4 180 top
R43  1k  [0402-RES]  87.88,17.02 180 top
R44  180  [0402-RES]  85.34,17.02 180 top
R45  4.7k  [0402-RES]  84.07,8.13 0 top
R46  4.7k  [0402-RES]  84.07,9.4 0 top
R47  4.7k  [0402-RES]  89.15,8.13 180 top
R48  4.7k  [0402-RES]  89.15,9.4 180 top
R49  1k  [0402-RES]  98.55,17.02 180 top
R50  180  [0402-RES]  96.01,17.02 180 top
R51  4.7k  [0402-RES]  94.74,8.13 0 top
R52  4.7k  [0402-RES]  94.74,9.4 0 top
R53  4.7k  [0402-RES]  99.82,8.13 180 top
R54  4.7k  [0402-RES]  99.82,9.4 180 top
R55  1k  [0402-RES]  109.22,17.02 180 top
R56  180  [0402-RES]  106.68,17.02 180 top
R57  4.7k  [0402-RES]  105.41,8.13 0 top
R58  4.7k  [0402-RES]  105.41,9.4 0 top
R59  4.7k  [0402-RES]  110.49,8.13 180 top
R60  4.7k  [0402-RES]  110.49,9.4 180 top
R61  1k  [0402-RES]  13.21,41.66 180 top
R62  180  [0402-RES]  10.67,41.66 180 top
R63  4.7k  [0402-RES]  9.4,32.77 0 top
R64  4.7k  [0402-RES]  9.4,34.04 0 top
R65  4.7k  [0402-RES]  14.48,32.77 180 top
R66  4.7k  [0402-RES]  14.48,34.04 180 top
R67  1k  [0402-RES]  23.88,41.66 180 top
R68  180  [0402-RES]  21.34,41.66 180 top
R69  4.7k  [0402-RES]  20.07,32.77 0 top
R70  4.7k  [0402-RES]  20.07,34.04 0 top
R71  4.7k  [0402-RES]  25.15,32.77 180 top
R72  4.7k  [0402-RES]  25.15,34.04 180 top
R73  1k  [0402-RES]  34.54,41.66 180 top
R74  180  [0402-RES]  32,41.66 180 top
R75  4.7k  [0402-RES]  30.73,32.77 0 top
R76  4.7k  [0402-RES]  30.73,34.04 0 top
R77  4.7k  [0402-RES]  35.81,32.77 180 top
R78  4.7k  [0402-RES]  35.81,34.04 180 top
R79  1k  [0402-RES]  45.21,41.66 180 top
R80  180  [0402-RES]  42.67,41.66 180 top
R81  4.7k  [0402-RES]  41.4,32.77 0 top
R82  4.7k  [0402-RES]  41.4,34.04 0 top
R83  4.7k  [0402-RES]  46.48,32.77 180 top
R84  4.7k  [0402-RES]  46.48,34.04 180 top
R85  1k  [0402-RES]  55.88,41.66 180 top
R86  180  [0402-RES]  53.34,41.66 180 top
R87  4.7k  [0402-RES]  52.07,32.77 0 top
R88  4.7k  [0402-RES]  52.07,34.04 0 top
R89  4.7k  [0402-RES]  57.15,32.77 180 top
R90  4.7k  [0402-RES]  57.15,34.04 180 top
R91  1k  [0402-RES]  66.55,41.66 180 top
R92  180  [0402-RES]  64.01,41.66 180 top
R93  4.7k  [0402-RES]  62.74,32.77 0 top
R94  4.7k  [0402-RES]  62.74,34.04 0 top
R95  4.7k  [0402-RES]  67.82,32.77 180 top
R96  4.7k  [0402-RES]  67.82,34.04 180 top
R97  1k  [0402-RES]  77.22,41.66 180 top
R98  180  [0402-RES]  74.68,41.66 180 top
R99  4.7k  [0402-RES]  73.41,32.77 0 top
R100  4.7k  [0402-RES]  73.41,34.04 0 top
R101  4.7k  [0402-RES]  78.49,32.77 180 top
R102  4.7k  [0402-RES]  78.49,34.04 180 top
R103  1k  [0402-RES]  87.88,41.66 180 top
R104  180  [0402-RES]  85.34,41.66 180 top
R105  4.7k  [0402-RES]  84.07,32.77 0 top
R106  4.7k  [0402-RES]  84.07,34.04 0 top
R107  4.7k  [0402-RES]  89.15,32.77 180 top
R108  4.7k  [0402-RES]  89.15,34.04 180 top
R109  1k  [0402-RES]  98.55,41.66 180 top
R110  180  [0402-RES]  96.01,41.66 180 top
R111  4.7k  [0402-RES]  94.74,32.77 0 top
R112  4.7k  [0402-RES]  94.74,34.04 0 top
R113  4.7k  [0402-RES]  99.82,32.77 180 top
R114  4.7k  [0402-RES]  99.82,34.04 180 top
R115  1k  [0402-RES]  109.22,41.66 180 top
R116  180  [0402-RES]  106.68,41.66 180 top
R117  4.7k  [0402-RES]  105.41,32.77 0 top
R118  4.7k  [0402-RES]  105.41,34.04 0 top
R119  4.7k  [0402-RES]  110.49,32.77 180 top
R120  4.7k  [0402-RES]  110.49,34.04 180 top
R121  1k  [0402-RES]  13.21,66.29 180 top
R122  180  [0402-RES]  10.67,66.29 180 top
R123  4.7k  [0402-RES]  9.4,57.4 0 top
R124  4.7k  [0402-RES]  9.4,58.67 0 top
R125  4.7k  [0402-RES]  14.48,57.4 180 top
R126  4.7k  [0402-RES]  14.48,58.67 180 top
R127  1k  [0402-RES]  23.88,66.29 180 top
R128  180  [0402-RES]  21.34,66.29 180 top
R129  4.7k  [0402-RES]  20.07,57.4 0 top
R130  4.7k  [0402-RES]  20.07,58.67 0 top
R131  4.7k  [0402-RES]  25.15,57.4 180 top
R132  4.7k  [0402-RES]  25.15,58.67 180 top
R133  1k  [0402-RES]  34.54,66.29 180 top
R134  180  [0402-RES]  32,66.29 180 top
R135  4.7k  [0402-RES]  30.73,57.4 0 top
R136  4.7k  [0402-RES]  30.73,58.67 0 top
R137  4.7k  [0402-RES]  35.81,57.4 180 top
R138  4.7k  [0402-RES]  35.81,58.67 180 top
R139  1k  [0402-RES]  45.21,66.29 180 top
R140  180  [0402-RES]  42.67,66.29 180 top
R141  4.7k  [0402-RES]  41.4,57.4 0 top
R142  4.7k  [0402-RES]  41.4,58.67 0 top
R143  4.7k  [0402-RES]  46.48,57.4 180 top
R144  4.7k  [0402-RES]  46.48,58.67 180 top
R145  1k  [0402-RES]  55.88,66.29 180 top
R146  180  [0402-RES]  53.34,66.29 180 top
R147  4.7k  [0402-RES]  52.07,57.4 0 top
R148  4.7k  [0402-RES]  52.07,58.67 0 top
R149  4.7k  [0402-RES]  57.15,57.4 180 top
R150  4.7k  [0402-RES]  57.15,58.67 180 top
R151  1k  [0402-RES]  66.55,66.29 180 top
R152  180  [0402-RES]  64.01,66.29 180 top
R153  4.7k  [0402-RES]  62.74,57.4 0 top
R154  4.7k  [0402-RES]  62.74,58.67 0 top
R155  4.7k  [0402-RES]  67.82,57.4 180 top
R156  4.7k  [0402-RES]  67.82,58.67 180 top
R157  1k  [0402-RES]  77.22,66.29 180 top
R158  180  [0402-RES]  74.68,66.29 180 top
R159  4.7k  [0402-RES]  73.41,57.4 0 top
R160  4.7k  [0402-RES]  73.41,58.67 0 top
R161  4.7k  [0402-RES]  78.49,57.4 180 top
R162  4.7k  [0402-RES]  78.49,58.67 180 top
R163  1k  [0402-RES]  87.88,66.29 180 top
R164  180  [0402-RES]  85.34,66.29 180 top
R165  4.7k  [0402-RES]  84.07,57.4 0 top
R166  4.7k  [0402-RES]  84.07,58.67 0 top
R167  4.7k  [0402-RES]  89.15,57.4 180 top
R168  4.7k  [0402-RES]  89.15,58.67 180 top
R169  1k  [0402-RES]  98.55,66.29 180 top
R170  180  [0402-RES]  96.01,66.29 180 top
R171  4.7k  [0402-RES]  94.74,57.4 0 top
R172  4.7k  [0402-RES]  94.74,58.67 0 top
R173  4.7k  [0402-RES]  99.82,57.4 180 top
R174  4.7k  [0402-RES]  99.82,58.67 180 top
R175  1k  [0402-RES]  109.22,66.29 180 top
R176  180  [0402-RES]  106.68,66.29 180 top
R177  4.7k  [0402-RES]  105.41,57.4 0 top
R178  4.7k  [0402-RES]  105.41,58.67 0 top
R179  4.7k  [0402-RES]  110.49,57.4 180 top
R180  4.7k  [0402-RES]  110.49,58.67 180 top
R181  1k  [0402-RES]  13.21,90.93 180 top
R182  180  [0402-RES]  10.67,90.93 180 top
R183  4.7k  [0402-RES]  9.4,82.04 0 top
R184  4.7k  [0402-RES]  9.4,83.31 0 top
R185  4.7k  [0402-RES]  14.48,82.04 180 top
R186  4.7k  [0402-RES]  14.48,83.31 180 top
R187  1k  [0402-RES]  23.88,90.93 180 top
R188  180  [0402-RES]  21.34,90.93 180 top
R189  4.7k  [0402-RES]  20.07,82.04 0 top
R190  4.7k  [0402-RES]  20.07,83.31 0 top
R191  4.7k  [0402-RES]  25.15,82.04 180 top
R192  4.7k  [0402-RES]  25.15,83.31 180 top
R193  1k  [0402-RES]  34.54,90.93 180 top
R194  180  [0402-RES]  32,90.93 180 top
R195  4.7k  [0402-RES]  30.73,82.04 0 top
R196  4.7k  [0402-RES]  30.73,83.31 0 top
R197  4.7k  [0402-RES]  35.81,82.04 180 top
R198  4.7k  [0402-RES]  35.81,83.31 180 top
R199  1k  [0402-RES]  45.21,90.93 180 top
R200  180  [0402-RES]  42.67,90.93 180 top
R201  4.7k  [0402-RES]  41.4,82.04 0 top
R202  4.7k  [0402-RES]  41.4,83.31 0 top
R203  4.7k  [0402-RES]  46.48,82.04 180 top
R204  4.7k  [0402-RES]  46.48,83.31 180 top
R205  1k  [0402-RES]  55.88,90.93 180 top
R206  180  [0402-RES]  53.34,90.93 180 top
R207  4.7k  [0402-RES]  52.07,82.04 0 top
R208  4.7k  [0402-RES]  52.07,83.31 0 top
R209  4.7k  [0402-RES]  57.15,82.04 180 top
R210  4.7k  [0402-RES]  57.15,83.31 180 top
R211  1k  [0402-RES]  66.55,90.93 180 top
R212  180  [0402-RES]  64.01,90.93 180 top
R213  4.7k  [0402-RES]  62.74,82.04 0 top
R214  4.7k  [0402-RES]  62.74,83.31 0 top
R215  4.7k  [0402-RES]  67.82,82.04 180 top
R216  4.7k  [0402-RES]  67.82,83.31 180 top
R217  1k  [0402-RES]  77.22,90.93 180 top
R218  180  [0402-RES]  74.68,90.93 180 top
R219  4.7k  [0402-RES]  73.41,82.04 0 top
R220  4.7k  [0402-RES]  73.41,83.31 0 top
R221  4.7k  [0402-RES]  78.49,82.04 180 top
R222  4.7k  [0402-RES]  78.49,83.31 180 top
R223  1k  [0402-RES]  87.88,90.93 180 top
R224  180  [0402-RES]  85.34,90.93 180 top
R225  4.7k  [0402-RES]  84.07,82.04 0 top
R226  4.7k  [0402-RES]  84.07,83.31 0 top
R227  4.7k  [0402-RES]  89.15,82.04 180 top
R228  4.7k  [0402-RES]  89.15,83.31 180 top
R229  1k  [0402-RES]  98.55,90.93 180 top
R230  180  [0402-RES]  96.01,90.93 180 top
R231  4.7k  [0402-RES]  94.74,82.04 0 top
R232  4.7k  [0402-RES]  94.74,83.31 0 top
R233  4.7k  [0402-RES]  99.82,82.04 180 top
R234  4.7k  [0402-RES]  99.82,83.31 180 top
R235  1k  [0402-RES]  109.22,90.93 180 top
R236  180  [0402-RES]  106.68,90.93 180 top
R237  4.7k  [0402-RES]  105.41,82.04 0 top
R238  4.7k  [0402-RES]  105.41,83.31 0 top
R239  4.7k  [0402-RES]  110.49,82.04 180 top
R240  4.7k  [0402-RES]  110.49,83.31 180 top
R241  1k  [0402-RES]  13.21,115.57 180 top
R242  180  [0402-RES]  10.67,115.57 180 top
R243  4.7k  [0402-RES]  9.4,106.68 0 top
R244  4.7k  [0402-RES]  9.4,107.95 0 top
R245  4.7k  [0402-RES]  14.48,106.68 180 top
R246  4.7k  [0402-RES]  14.48,107.95 180 top
R247  1k  [0402-RES]  23.88,115.57 180 top
R248  180  [0402-RES]  21.34,115.57 180 top
R249  4.7k  [0402-RES]  20.07,106.68 0 top
R250  4.7k  [0402-RES]  20.07,107.95 0 top
R251  4.7k  [0402-RES]  25.15,106.68 180 top
R252  4.7k  [0402-RES]  25.15,107.95 180 top
R253  1k  [0402-RES]  34.54,115.57 180 top
R254  180  [0402-RES]  32,115.57 180 top
R255  4.7k  [0402-RES]  30.73,106.68 0 top
R256  4.7k  [0402-RES]  30.73,107.95 0 top
R257  4.7k  [0402-RES]  35.81,106.68 180 top
R258  4.7k  [0402-RES]  35.81,107.95 180 top
R259  1k  [0402-RES]  45.21,115.57 180 top
R260  180  [0402-RES]  42.67,115.57 180 top
R261  4.7k  [0402-RES]  41.4,106.68 0 top
R262  4.7k  [0402-RES]  41.4,107.95 0 top
R263  4.7k  [0402-RES]  46.48,106.68 180 top
R264  4.7k  [0402-RES]  46.48,107.95 180 top
R265  1k  [0402-RES]  55.88,115.57 180 top
R266  180  [0402-RES]  53.34,115.57 180 top
R267  4.7k  [0402-RES]  52.07,106.68 0 top
R268  4.7k  [0402-RES]  52.07,107.95 0 top
R269  4.7k  [0402-RES]  57.15,106.68 180 top
R270  4.7k  [0402-RES]  57.15,107.95 180 top
R271  1k  [0402-RES]  66.55,115.57 180 top
R272  180  [0402-RES]  64.01,115.57 180 top
R273  4.7k  [0402-RES]  62.74,106.68 0 top
R274  4.7k  [0402-RES]  62.74,107.95 0 top
R275  4.7k  [0402-RES]  67.82,106.68 180 top
R276  4.7k  [0402-RES]  67.82,107.95 180 top
R277  1k  [0402-RES]  77.22,115.57 180 top
R278  180  [0402-RES]  74.68,115.57 180 top
R279  4.7k  [0402-RES]  73.41,106.68 0 top
R280  4.7k  [0402-RES]  73.41,107.95 0 top
R281  4.7k  [0402-RES]  78.49,106.68 180 top
R282  4.7k  [0402-RES]  78.49,107.95 180 top
R283  1k  [0402-RES]  87.88,115.57 180 top
R284  180  [0402-RES]  85.34,115.57 180 top
R285  4.7k  [0402-RES]  84.07,106.68 0 top
R286  4.7k  [0402-RES]  84.07,107.95 0 top
R287  4.7k  [0402-RES]  89.15,106.68 180 top
R288  4.7k  [0402-RES]  89.15,107.95 180 top
R289  1k  [0402-RES]  98.55,115.57 180 top
R290  180  [0402-RES]  96.01,115.57 180 top
R291  4.7k  [0402-RES]  94.74,106.68 0 top
R292  4.7k  [0402-RES]  94.74,107.95 0 top
R293  4.7k  [0402-RES]  99.82,106.68 180 top
R294  4.7k  [0402-RES]  99.82,107.95 180 top
R295  1k  [0402-RES]  109.22,115.57 180 top
R296  180  [0402-RES]  106.68,115.57 180 top
R297  4.7k  [0402-RES]  105.41,106.68 0 top
R298  4.7k  [0402-RES]  105.41,107.95 0 top
R299  4.7k  [0402-RES]  110.49,106.68 180 top
R300  4.7k  [0402-RES]  110.49,107.95 180 top
R301  1k  [0402-RES]  13.21,140.21 180 top
R302  180  [0402-RES]  10.67,140.21 180 top
R303  4.7k  [0402-RES]  9.4,131.32 0 top
R304  4.7k  [0402-RES]  9.4,132.59 0 top
R305  4.7k  [0402-RES]  14.48,131.32 180 top
R306  4.7k  [0402-RES]  14.48,132.59 180 top
R307  1k  [0402-RES]  23.88,140.21 180 top
R308  180  [0402-RES]  21.34,140.21 180 top
R309  4.7k  [0402-RES]  20.07,131.32 0 top
R310  4.7k  [0402-RES]  20.07,132.59 0 top
R311  4.7k  [0402-RES]  25.15,131.32 180 top
R312  4.7k  [0402-RES]  25.15,132.59 180 top
R313  1k  [0402-RES]  34.54,140.21 180 top
R314  180  [0402-RES]  32,140.21 180 top
R315  4.7k  [0402-RES]  30.73,131.32 0 top
R316  4.7k  [0402-RES]  30.73,132.59 0 top
R317  4.7k  [0402-RES]  35.81,131.32 180 top
R318  4.7k  [0402-RES]  35.81,132.59 180 top
R319  1k  [0402-RES]  45.21,140.21 180 top
R320  180  [0402-RES]  42.67,140.21 180 top
R321  4.7k  [0402-RES]  41.4,131.32 0 top
R322  4.7k  [0402-RES]  41.4,132.59 0 top
R323  4.7k  [0402-RES]  46.48,131.32 180 top
R324  4.7k  [0402-RES]  46.48,132.59 180 top
R325  1k  [0402-RES]  55.88,140.21 180 top
R326  180  [0402-RES]  53.34,140.21 180 top
R327  4.7k  [0402-RES]  52.07,131.32 0 top
R328  4.7k  [0402-RES]  52.07,132.59 0 top
R329  4.7k  [0402-RES]  57.15,131.32 180 top
R330  4.7k  [0402-RES]  57.15,132.59 180 top
R331  1k  [0402-RES]  66.55,140.21 180 top
R332  180  [0402-RES]  64.01,140.21 180 top
R333  4.7k  [0402-RES]  62.74,131.32 0 top
R334  4.7k  [0402-RES]  62.74,132.59 0 top
R335  4.7k  [0402-RES]  67.82,131.32 180 top
R336  4.7k  [0402-RES]  67.82,132.59 180 top
R337  1k  [0402-RES]  77.22,140.21 180 top
R338  180  [0402-RES]  74.68,140.21 180 top
R339  4.7k  [0402-RES]  73.41,131.32 0 top
R340  4.7k  [0402-RES]  73.41,132.59 0 top
R341  4.7k  [0402-RES]  78.49,131.32 180 top
R342  4.7k  [0402-RES]  78.49,132.59 180 top
R343  1k  [0402-RES]  87.88,140.21 180 top
R344  180  [0402-RES]  85.34,140.21 180 top
R345  4.7k  [0402-RES]  84.07,131.32 0 top
R346  4.7k  [0402-RES]  84.07,132.59 0 top
R347  4.7k  [0402-RES]  89.15,131.32 180 top
R348  4.7k  [0402-RES]  89.15,132.59 180 top
R349  1k  [0402-RES]  98.55,140.21 180 top
R350  180  [0402-RES]  96.01,140.21 180 top
R351  4.7k  [0402-RES]  94.74,131.32 0 top